# Altium PCB corePCB.PcbDoc (part 1 of 3)
Units mil, origin at the board's own origin, x right, y up, seen from the top; angles counter-clockwise.
Board outline 3543.31 x 3543.31 mil, 4 copper layers (Top Layer, Layer 1, Layer 2, Bottom Layer), stack 23.756 mil thick; 90 components, 166 nets, 640 pads, 472 vias.
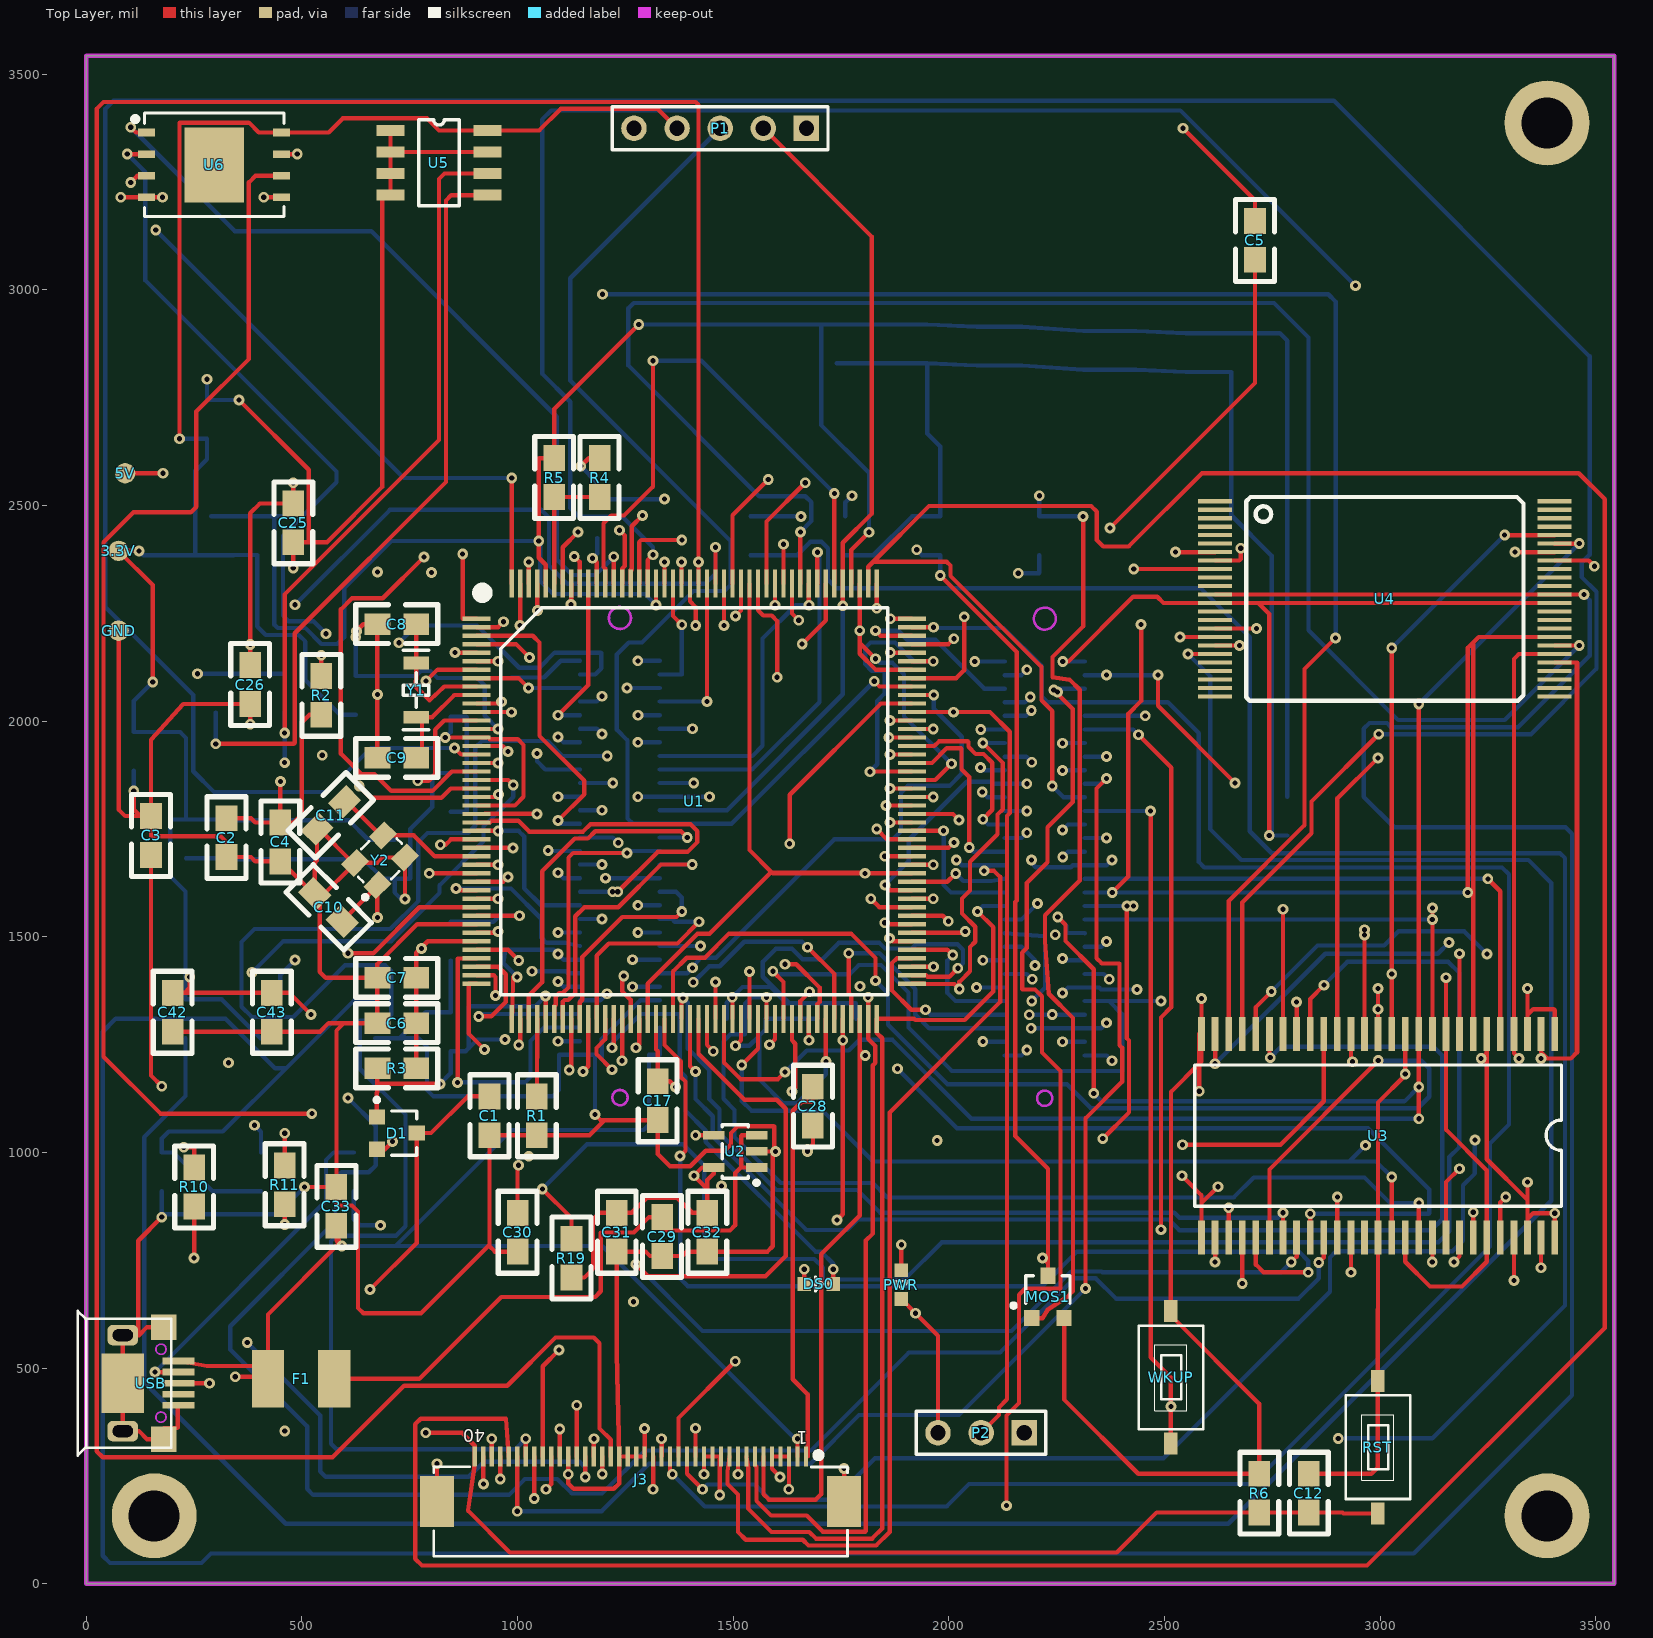
[diagram p0: Top Layer view]
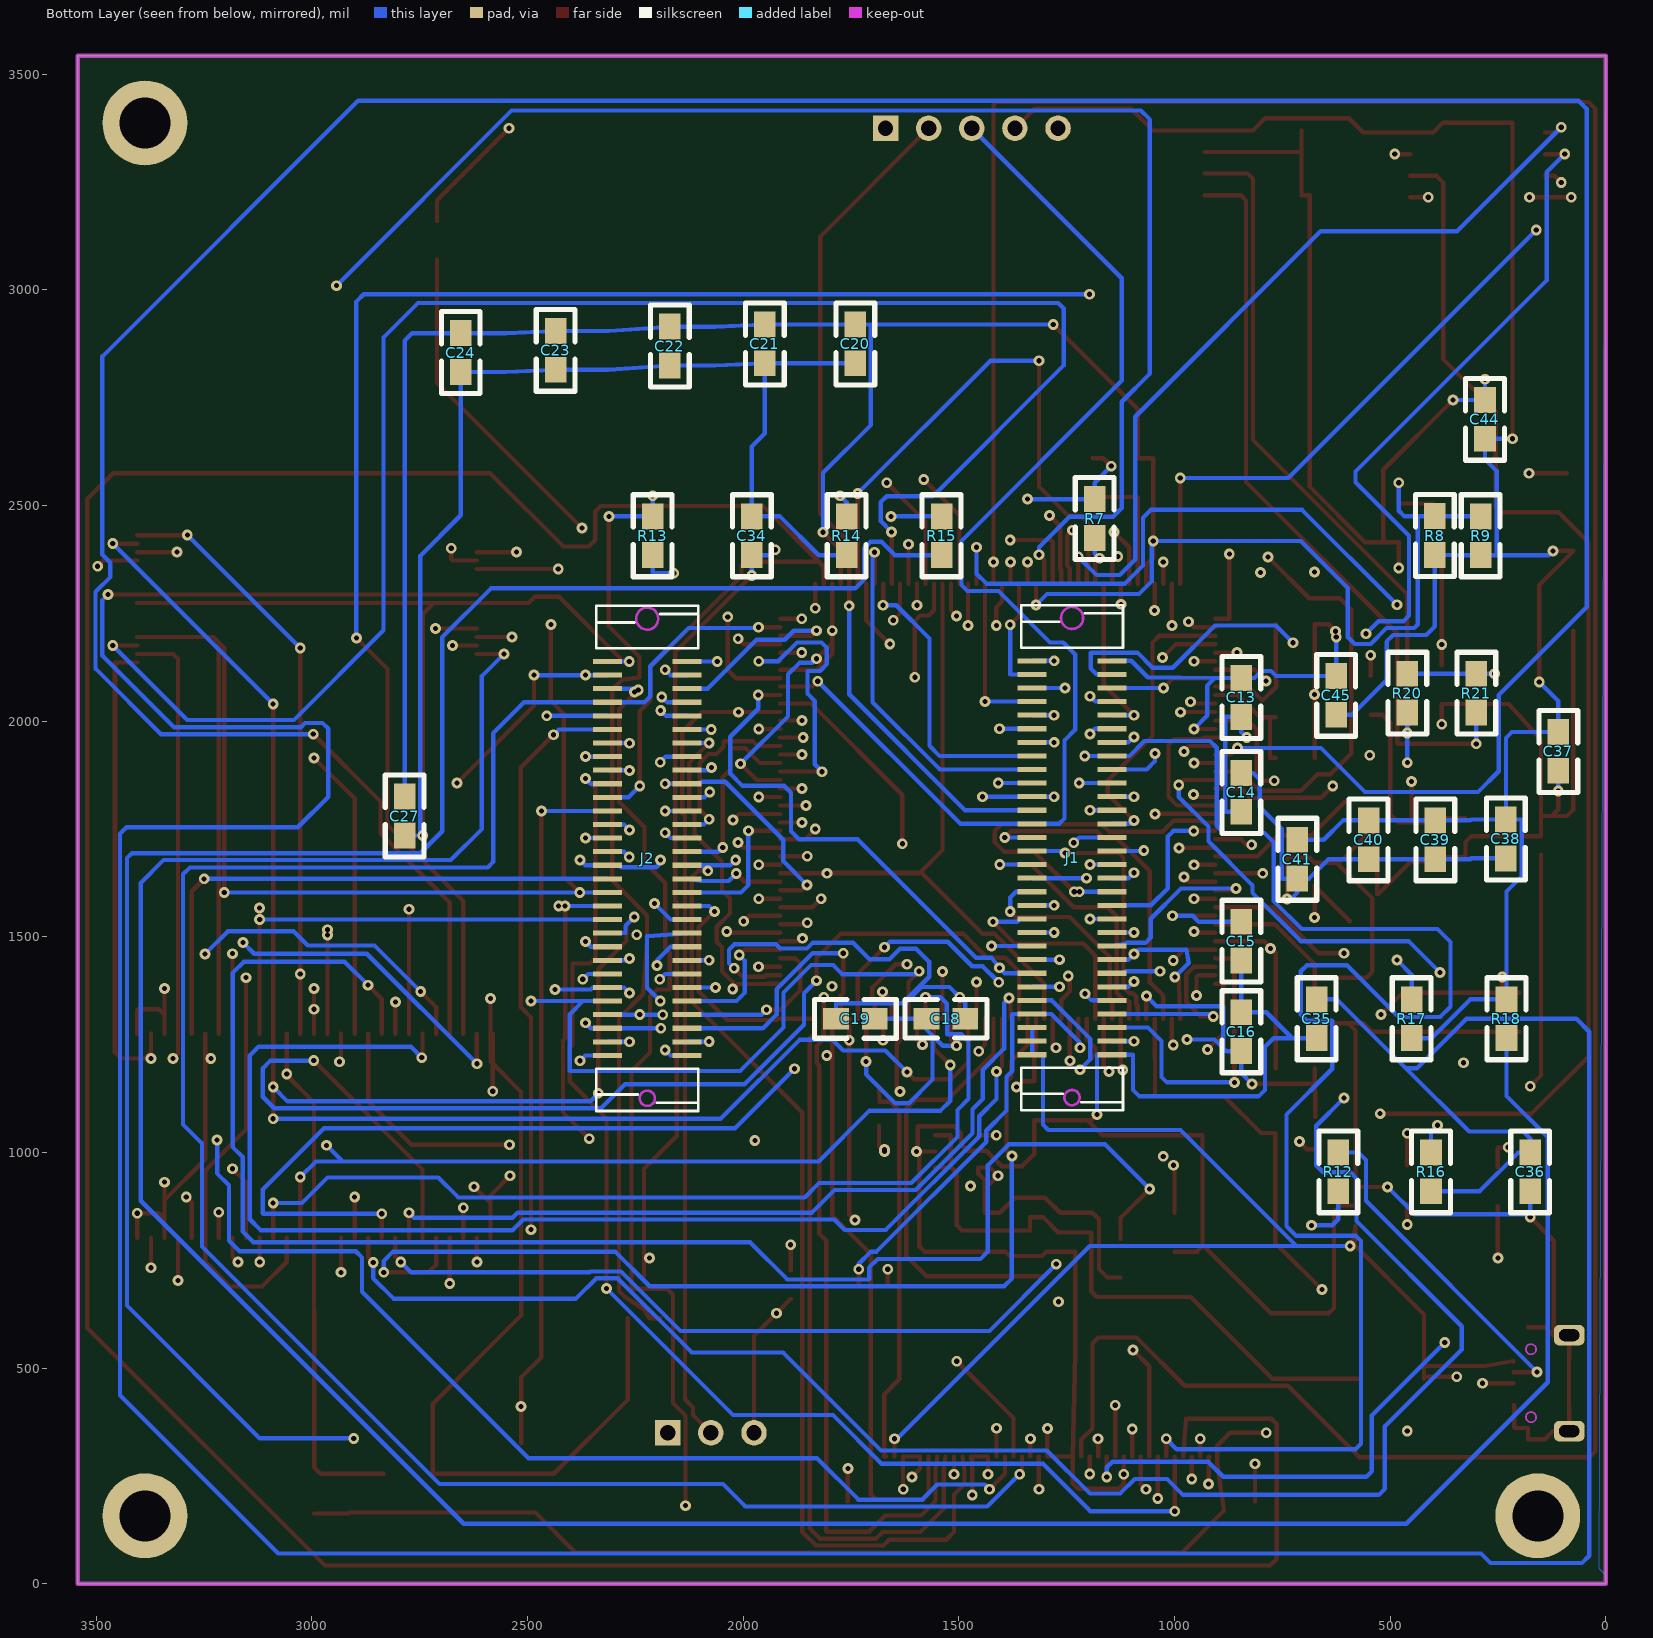
[diagram p1: Bottom Layer view, seen from below]
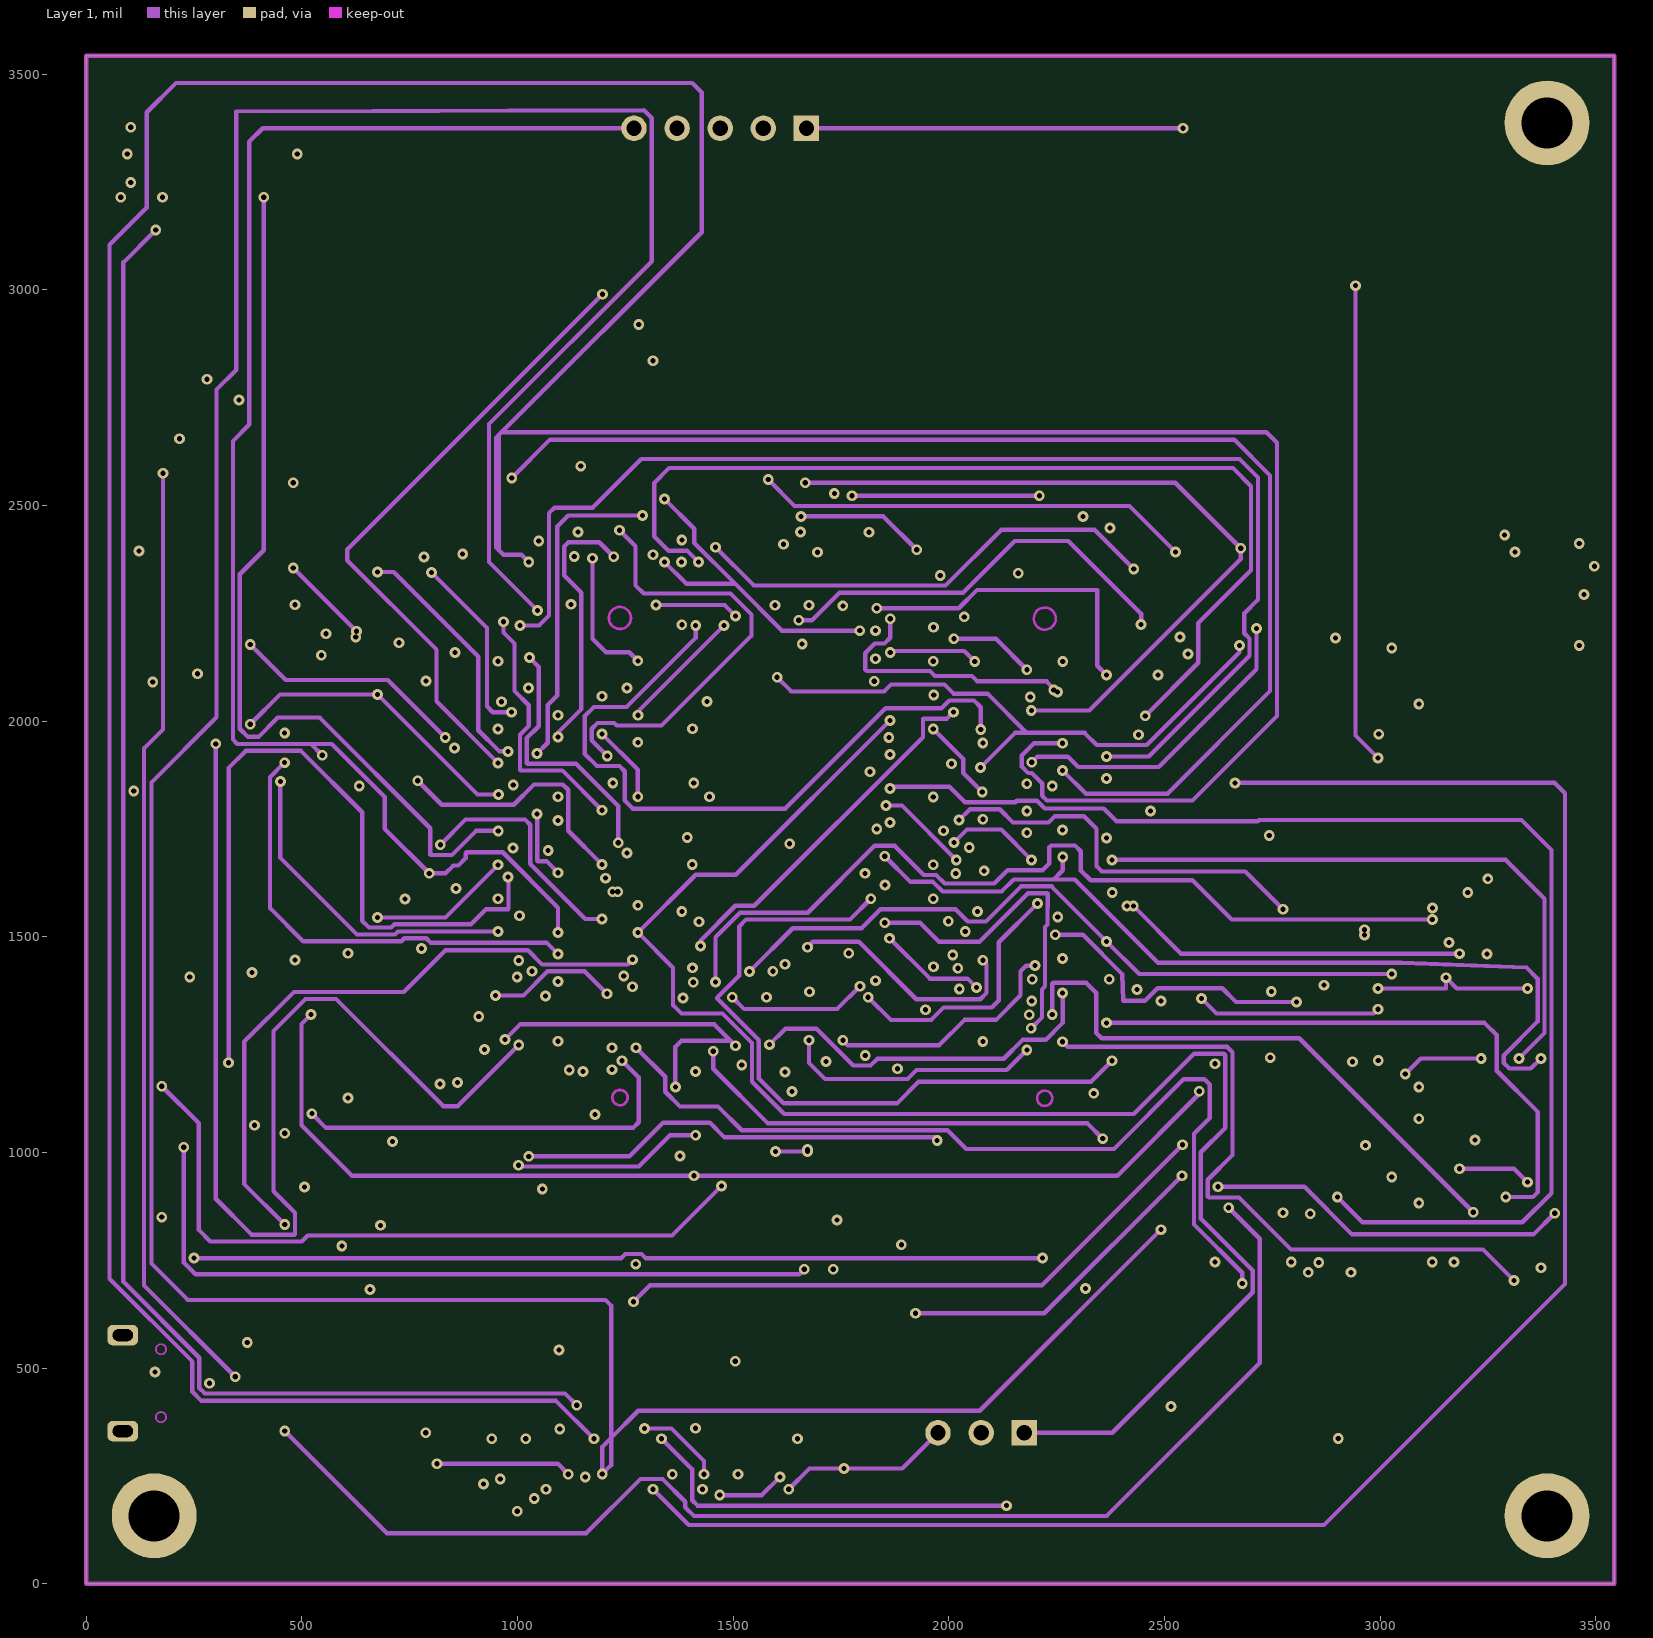
[diagram p2: Layer 1]
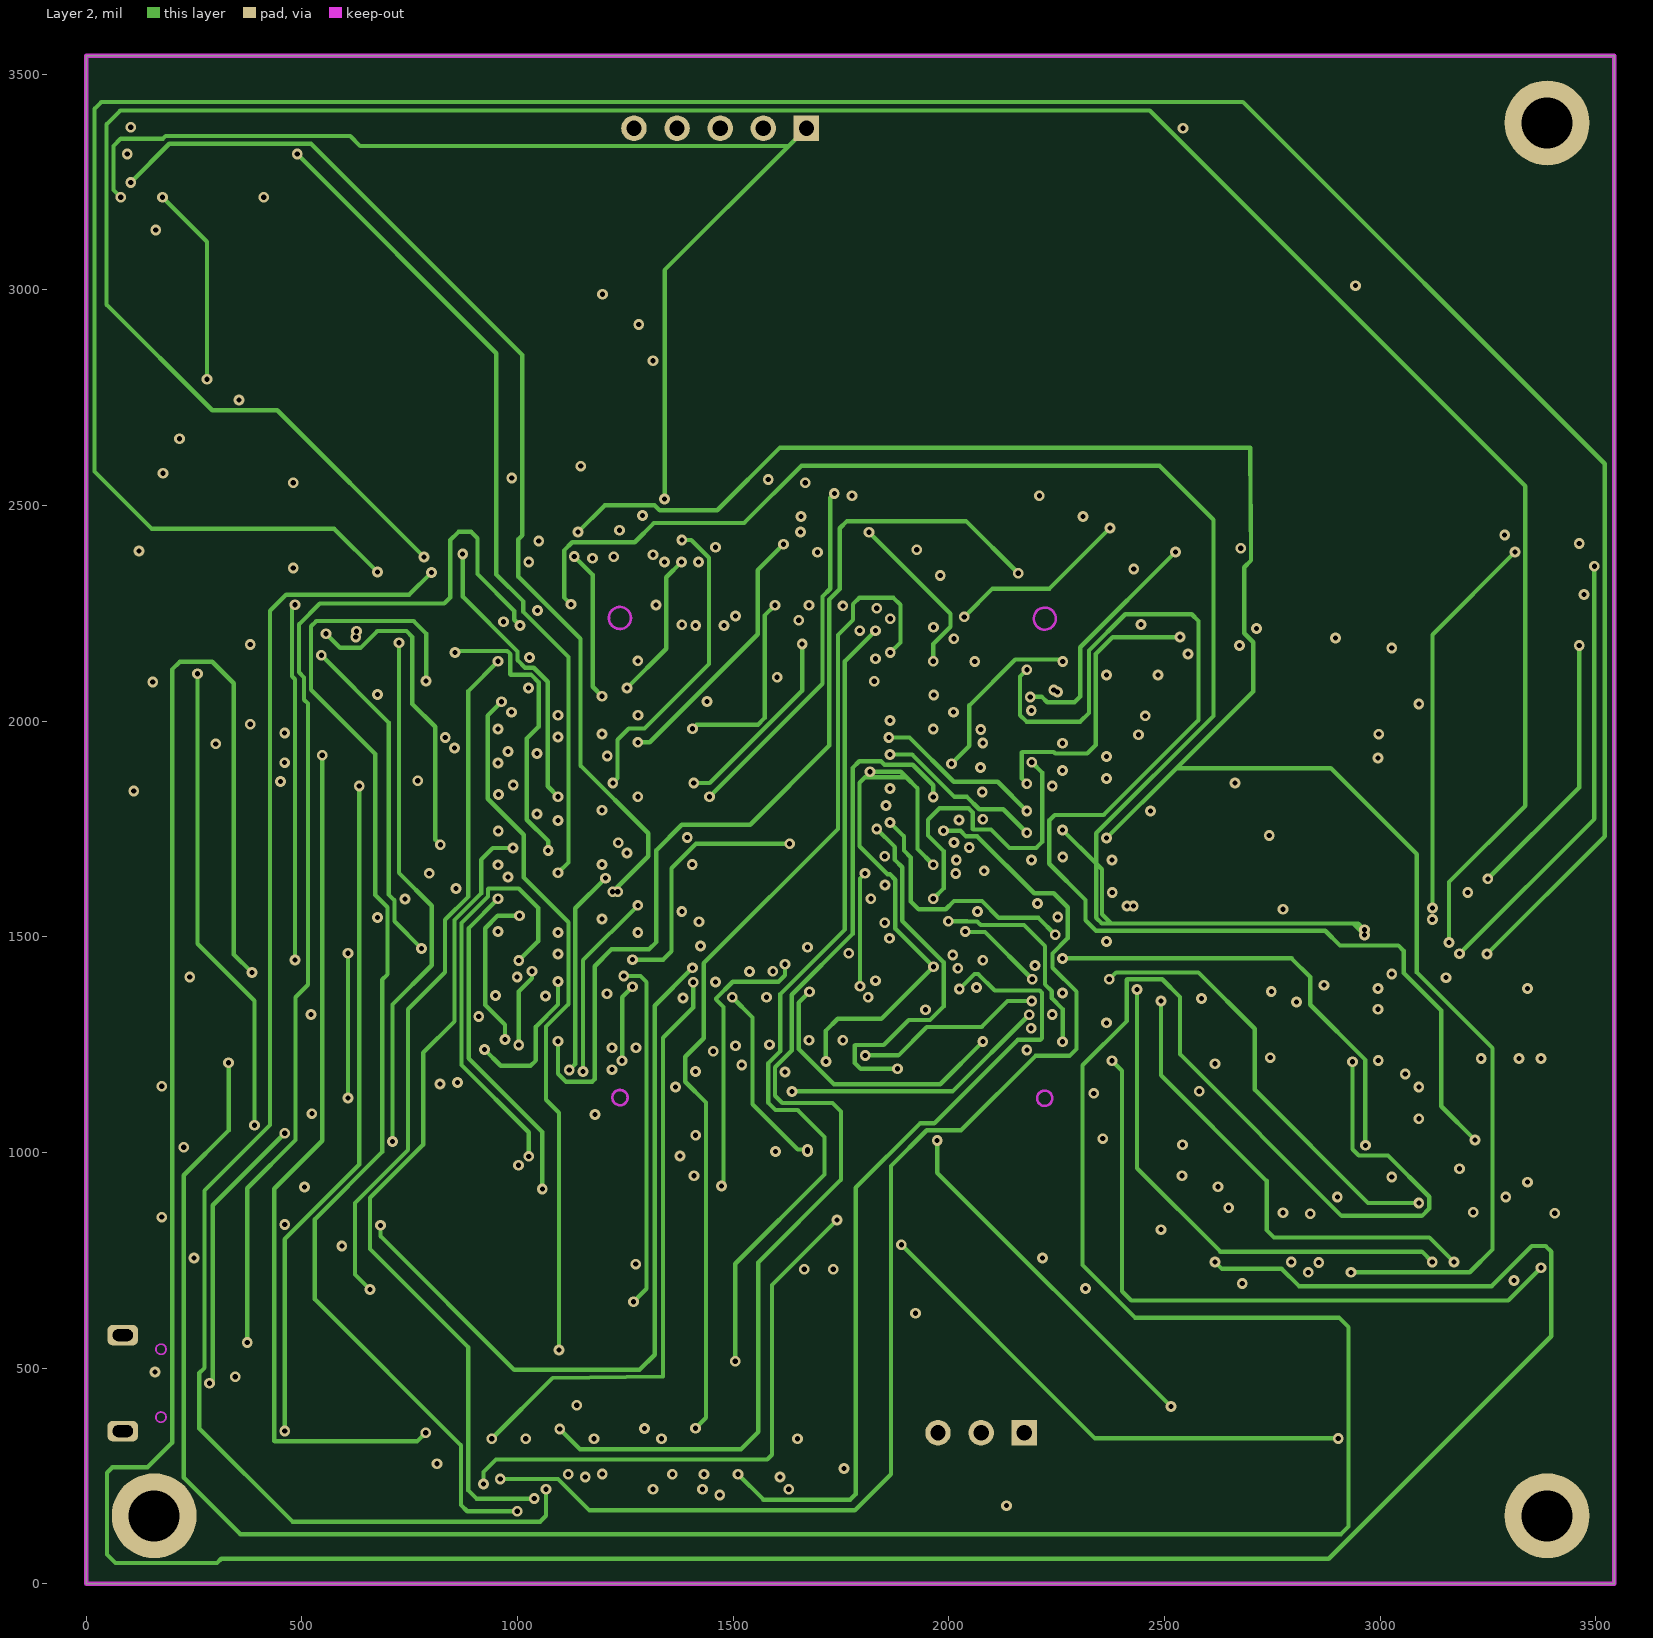
[diagram p3: Layer 2]

## Layer stack, top to bottom
Top Solder: solder mask 0.4, Solder Resist, Dk 3.5
Top Layer: signal copper 1.4
Dielectric1: prepreg 2.8, PP-006, Dk 4.1
Layer 1: signal copper 1.3779
Dielectric2: dielectric 12.6, FR-4, Dk 4.8
Layer 2: signal copper 1.3779
Dielectric3: prepreg 2.8, PP-006, Dk 4.1
Bottom Layer: signal copper 1.4
Bottom Solder: solder mask 0.4, Solder Resist, Dk 3.5

## Board outline
0,0 0,3543.31 3543.31,3543.31 3543.31,0

## Design rules (kind name [scope] priority, off if disabled: settings)
Clearance Clearance_GND [(InPolygon)] p1: gap=20 ignorepadtopadclearanceinfootprint=FALSE except(0: Arc-Hole Track-Hole SMDPad-Hole THPad-Hole Via-Hole Fill-Hole Poly-Hole Region-Hole Text-Hole)
Clearance [All] p2: gap=6 ignorepadtopadclearanceinfootprint=FALSE except(0: Arc-Hole Track-Hole SMDPad-Hole THPad-Hole Via-Hole Fill-Hole Poly-Hole Region-Hole Text-Hole)
ComponentClearance [All] p1: gap=0 collisioncheckmode=3 verticalgap=0 showdistances=FALSE
HoleSize [All] p1: absolutevalues=TRUE maxlimit=1000 minlimit=1 maxpercent=80.000 minpercent=20.000
HoleSize Testpoint [All] p2: absolutevalues=TRUE maxlimit=100 minlimit=1 maxpercent=80.000 minpercent=20.000
HoleSize TestPointUsage [All] p3: absolutevalues=TRUE maxlimit=100 minlimit=1 maxpercent=80.000 minpercent=20.000
MinimumSolderMaskSliver [All] p1: minsoldermaskwidth=0
ParallelSegment ParallelSegment_1 [InNetClass('dcmi') vs InNetClass('dcmi')] p1: limit=10000 gap=10
ParallelSegment [InNetClass('fmc') vs InNetClass('spi')] p2: limit=10000 gap=10
PlaneConnect [All] p1: planeconnectstyle=Direct reliefexpansion=20 reliefentries=4 reliefconductorwidth=10 reliefairgap=10
PolygonConnect [All] p1: connectstyle=Direct reliefconductorwidth=10 reliefentries=4 polygonreliefangle="90 Angle" airgapwidth=10
RoutingVias [All] p1: holewidth=12 width=25 viastyle="Through Hole" minholewidth=8 minwidth=15 maxholewidth=50 maxwidth=50
SilkToSilkClearance [All] p1: silktosilkclearance=0
SilkToSolderMaskClearance SilkscreenOverComponentPads [IsPad] p1: minsilkscreentomaskgap=0 clearancetoexposedcopper=TRUE
SolderMaskExpansion [All] p1: expansion=4
Width [All] p1: maxlimit=100 minlimit=6 preferedwidth=10
24 further rules are at their usual default settings.

## Classes and differential pairs
net class spi: PE2 PE4 PE5 PE6
net class fmc: FMC_A0 FMC_A1 FMC_A2 FMC_A3 FMC_A4 FMC_A5 FMC_A6 FMC_A7 FMC_A8 FMC_A9 FMC_A10 FMC_A11 FMC_A12 FMC_A16_CLE FMC_A17_ALE FMC_A18 FMC_BA0 FMC_BA1 FMC_D0 FMC_D1 FMC_D2 FMC_D3 FMC_D4 FMC_D5 FMC_D6 FMC_D7 FMC_D8 FMC_D9 FMC_D10 FMC_D11 FMC_D12 FMC_D13 FMC_D14 FMC_D15 FMC_NBL0 FMC_NBL1 FMC_NCE3 FMC_NE1 FMC_NOE FMC_NWAIT FMC_NWE FMC_SDCKE0 FMC_SDCLK FMC_SDNCAS FMC_SDNE0 FMC_SDNRAS FMC_SDNWE
net class dcmi: DCMI_D0 DCMI_D1 DCMI_D2 DCMI_D3 DCMI_D4 DCMI_D5 DCMI_D6 DCMI_D7 DCMI_HREF DCMI_PLCK DCMI_SCL DCMI_SDA DCMI_XCLK
component class circuit: 3.3V 5V C28 C29 C30 C31 C32 C33 C34 DS0 F1 GND J3 MOS1 P2 PWR R10 R11 R12 R13 R14 R15 U2 USB WKUP
component class mem: C35 C36 C37 C38 C39 C40 C41 C42 C43 C44 C45 R16 R17 R18 R19 R20 R21 U3 U4 U5 U6
component class stm: C1 C2 C3 C4 C5 C6 C7 C8 C9 C10 C11 C12 C13 C14 C15 C16 C17 C18 C19 C20 C21 C22 C23 C24 C25 C26 C27 D1 J1 J2 P1 R1 R2 R3 R4 R5 R6 R7 R8 R9 RST U1 Y1 Y2

## Components (designator, comment, footprint, x,y, rotation, side; value= is the part's Value field where it differs from the comment)
3.3V "TEST POINT" TP-1.5 75,2395 r90 top
5V "TEST POINT" TP-1.5 90,2575 r0 top
C1 "104" 0805 935,1130 r270 top
C2 "104" 0805 325,1685 r90 top
C3 "225" 0805 150,1690 r90 top
C4 "225" 0805 450,1675 r90 top
C5 "225" 0805 2710,3070 r90 top
C6 "10uF" 0805 675,1300 r0 top
C7 "104" 0805 675,1405 r0 top
C8 "6pF" 0805 675,2225 r0 top
C9 "6pF" 0805 675,1915 r0 top
C10 "22pF" 0805 530,1600 r315 top
C11 "22pF" 0805 535,1750 r45 top
C12 "104" 0805 2835,165 r90 top
C13 "104" 0805 845,2100 r270 bottom
C14 "104" 0805 845,1880 r270 bottom
C15 "104" 0805 845,1445 r90 bottom
C16 "104" 0805 845,1325 r270 bottom
C17 "104" 0805 1325,1075 r90 top
C18 "104" 0805 1485,1310 r0 bottom
C19 "104" 0805 1785,1310 r180 bottom
C20 "104" 0805 1740.06,2830 r90 bottom
C21 "104" 0805 1950,2830 r90 bottom
C22 "104" 0805 2170.06,2825 r90 bottom
C23 "104" 0805 2435,2815 r90 bottom
C24 "104" 0805 2655.06,2810 r90 bottom
C25 "104" 0805 479.94,2415 r90 top
C26 "104" 0805 380,2040 r90 top
C27 "104" 0805 2785.06,1735 r90 bottom
C28 "104" 0805 1684.94,1062.4 r90 top
C29 "10uF" 0805 1335,760 r90 top
C30 "103" 0805 1000,770 r90 top
C31 "104" 0805 1230,770 r90 top
C32 "10uF" 0805 1440,770 r90 top
C33 "104" 0805 580,830 r90 top
C34 "104" 0805 1980.13,2385 r90 bottom
C35 "104" 0805 670.13,1265 r90 bottom
C36 "104" 0805 175.13,910 r90 bottom
C37 "104" 0805 110.06,1885 r90 bottom
C38 "104" 0805 231.45,1681.93 r90 bottom
C39 "104" 0805 395,1680 r90 bottom
C40 "104" 0805 550,1680 r90 bottom
C41 "104" 0805 715,1635 r90 bottom
C42 "104" 0805 200,1280 r90 top
C43 "104" 0805 430,1280 r90 top
C44 "104" 0805 280,2655 r90 bottom
C45 "104" 0805 625,2015 r90 bottom
D1 "BAT54C" SOT-23 715,1045 r270 top
DS0 "LED" SMDLED-0603 1665,695 r0 top
F1 "1812L075PR" *1812 498.23,475 r0 top
GND "TEST POINT" TP-1.5 75,2210 r90 top
J1 "3710M060046G3FT01" 3710F060046G3FT01 1330,1226.61 r0 bottom
J2 "3710M060046G3FT01" 3710F060046G3FT01 2315.04,1225.04 r0 bottom
J3 "RGBLCD" FPC-TOP40 1668.7,299 r180 top
MOS1 "SI2301" SO-G3/C2.5 2230,665 r0 top
P1 "SWD" HDR1X5 1670,3375 r180 top
P2 "USART1" HDR1X3 2175,350 r180 top
PWR "LED" SMDLED-0603 1890,726.93 r270 top
R1 "10K" 0805 1045,1130 r270 top
R2 "10R" 0805 545,2015 r90 top
R3 "10R" 0805 765,1195 r180 top
R4 "0R" 0805 1190.06,2520 r90 top
R5 "0R" 0805 1085,2520 r90 top
R6 "10K" 0805 2720,165 r90 top
R7 "100K" 0805 1185,2425 r90 bottom
R8 "0R" 0805 396.13,2385.59 r90 bottom
R9 "0R" 0805 290,2385 r90 bottom
R10 "1K" 0805 249.94,875 r90 top
R11 "10R" 0805 460,880 r90 top
R12 "10R" 0805 620.06,910 r90 bottom
R13 "10R" 0805 2210.13,2385 r90 bottom
R14 "100K" 0805 1760.13,2385 r90 bottom
R15 "1K" 0805 1540.13,2385 r90 bottom
R16 "0R" 0805 405.13,910 r90 bottom
R17 "10K" 0805 450.13,1265 r90 bottom
R18 "10K" 0805 230.13,1265 r90 bottom
R19 "10K" 0805 1125,710 r90 top
R20 "4.7K" 0805 460,2020 r90 bottom
R21 "4.7K" 0805 300.13,2020 r90 bottom
RST "KEY_M" KEY_SOP3625 2995,162.91 r90 top
U1 "STM32F767IGT6" LQFP176 905.3,2237.78 r0 top locked
U2 "CAT6219-330TD" SOT-23-5 1555,965 r180 top
U3 "W9825G6KH" TSOP54 3404.96,1275 r270 top
U4 "MT29F4G08" TSOP48 2617.6,2510.27 r0 top
U5 "24C02" SOP-8 705.59,3370 r0 top
U6 "W25Q256" WSON8 296.5,3290 r0 top
USB "USB-AB" "USB_AB - 5S - B" 0,465 r90 top
WKUP "KEY_UP" KEY_SOP3625 2515,325 r90 top
Y1 "32.768KHz" XTAL3215 765,2135 r270 top
Y2 "25Mhz" XTAL3225 675,1620 r45 top

## Footprints (in the part's own frame and the unit in brackets; to place one, negate y for a bottom-side part, rotate by r counter-clockwise, add the part's x,y. Pads: shape width x height; smd on the part's side, far side on the other; paste and mask are expansions set on the pad)
0805 [mil]
  rect 60x50 smd: 1(0,-0.06) 2(90,-0.06)
  silkscreen extent -50,-45 140,45
3710F060046G3FT01 [mm]
  rect 1.7x0.3 smd: 1(-4.7,0) 2(-4.7,-0.8) 3(-4.7,-1.6) 4(-4.7,-2.4) 5(-4.7,-3.2) 6(-4.7,-4) 7(-4.7,-4.8) 8(-4.7,-5.6) 9(-4.7,-6.4) 10(-4.7,-7.2) 11(-4.7,-8) 12(-4.7,-8.8) 13(-4.7,-9.6) 14(-4.7,-10.4) 15(-4.7,-11.2) 16(-4.7,-12) 17(-4.7,-12.8) 18(-4.7,-13.6) 19(-4.7,-14.4) 20(-4.7,-15.2) 21(-4.7,-16) 22(-4.7,-16.8) 23(-4.7,-17.6) 24(-4.7,-18.4) 25(-4.7,-19.2) 26(-4.7,-20) 27(-4.7,-20.8) 28(-4.7,-21.6) 29(-4.7,-22.4) 30(-4.7,-23.2) 31(0,-23.2) 32(0,-22.4) 33(0,-21.6) 34(0,-20.8) 35(0,-20) 36(0,-19.2) 37(0,-18.4) 38(0,-17.6) 39(0,-16.8) 40(0,-16) 41(0,-15.2) 42(0,-14.4) 43(0,-13.6) 44(0,-12.8) 45(0,-12) 46(0,-11.2) 47(0,-10.4) 48(0,-9.6) 49(0,-8.8) 50(0,-8) 51(0,-7.2) 52(0,-6.4) 53(0,-5.6) 54(0,-4.8) 55(0,-4) 56(0,-3.2) 57(0,-2.4) 58(0,-1.6) 59(0,-0.8) 60(0,0)
  Keep-Out Layer circle w0.152: c-2.35,-25.725 r0.65
  Keep-Out Layer circle w0.152: c-2.35,2.525 r0.45
  silkscreen extent -5.35,-26.48 0.65,3.27
*1812 [mm]
  rect 1.9x3.4 smd: 1(-1.95,0) 2(1.95,0)
FPC-TOP40 [mm]
  rect 0.25x1.2 smd: 1(0,0.102) 2(0.5,0.102) 3(1,0.102) 4(1.5,0.102) 5(2,0.102) 6(2.5,0.102) 7(3,0.102) 8(3.5,0.102) 9(4,0.102) 10(4.5,0.102) 11(5,0.102) 12(5.5,0.102) 13(6,0.102) 14(6.5,0.102) 15(7,0.102) 16(7.5,0.102) 17(8,0.102) 18(8.5,0.102) 19(9,0.102) 20(9.5,0.102) 21(10,0.102) 22(10.5,0.102) 23(11,0.102) 24(11.5,0.102) 25(12,0.102) 26(12.5,0.102) 27(13,0.102) 28(13.5,0.102) 29(14,0.102) 30(14.5,0.102) 31(15,0.102) 32(15.5,0.102) 33(16,0.102) 34(16.5,0.102) 35(17,0.102) 36(17.5,0.102) 37(18,0.102) 38(18.5,0.102) 39(19,0.102) 40(19.5,0.102)
  rect 2x3 smd: A(-2.25,2.754) B(21.725,2.754)
  silkscreen extent -2.45,-0.15 21.92,5.97
HDR1X3 [mm]
  rect 1.5x1.5 hole 0.9: 1(0,0)
  round 1.5 hole 0.9: 2(2.54,0) 3(5.08,0)
  silkscreen extent -1.27,-1.27 6.35,1.27
HDR1X5 [mm]
  rect 1.5x1.5 hole 0.9: 1(0,0)
  round 1.5 hole 0.9: 2(2.54,0) 3(5.08,0) 4(7.62,0) 5(10.16,0)
  silkscreen extent -1.27,-1.27 11.43,1.27
KEY_SOP3625 [mm]
  rect 1.3x0.8 smd: 1(0,0) 2(7.8,0)
  silkscreen extent 0.85,-1.9 6.95,1.9
LQFP176 [mm]
  rect 1.65x0.254 smd: 1(0,0) 2(0,-0.5) 3(0,-1) 4(0,-1.5) 5(0,-2) 6(0,-2.5) 7(0,-3) 8(0,-3.5) 9(0,-4) 10(0,-4.5) 11(0,-5) 12(0,-5.5) 13(0,-6) 14(0,-6.5) 15(0,-7) 16(0,-7.5) 17(0,-8) 18(0,-8.5) 19(0,-9) 20(0,-9.5) 21(0,-10) 22(0,-10.5) 23(0,-11) 24(0,-11.5) 25(0,-12) 26(0,-12.5) 27(0,-13) 28(0,-13.5) 29(0,-14) 30(0,-14.5) 31(0,-15) 32(0,-15.5) 33(0,-16) 34(0,-16.5) 35(0,-17) 36(0,-17.5) 37(0,-18) 38(0,-18.5) 39(0,-19) 40(0,-19.5) 41(0,-20) 42(0,-20.5) 43(0,-21) 44(0,-21.5) 89(25.631,-21.5) 90(25.631,-21) 91(25.631,-20.5) 92(25.631,-20) 93(25.631,-19.5) 94(25.631,-19) 95(25.631,-18.5) 96(25.631,-18) 97(25.631,-17.5) 98(25.631,-17) 99(25.631,-16.5) 100(25.631,-16) 101(25.631,-15.5) 102(25.631,-15) 103(25.631,-14.5) 104(25.631,-14) 105(25.631,-13.5) 106(25.631,-13) 107(25.631,-12.5) 108(25.631,-12) 109(25.631,-11.5) 110(25.631,-11) 111(25.631,-10.5) 112(25.631,-10) 113(25.631,-9.5) 114(25.631,-9) 115(25.631,-8.5) 116(25.631,-8) 117(25.631,-7.5) 118(25.631,-7) 119(25.631,-6.5) 120(25.631,-6) 121(25.631,-5.5) 122(25.631,-5) 123(25.631,-4.5) 124(25.631,-4) 125(25.631,-3.5) 126(25.631,-3) 127(25.631,-2.5) 128(25.631,-2) 129(25.631,-1.5) 130(25.631,-1) 131(25.631,-0.5) 132(25.631,0)
  rect 0.254x1.65 smd: 45(2.065,-23.566) 46(2.566,-23.566) 47(3.066,-23.566) 48(3.565,-23.566) 49(4.066,-23.566) 50(4.565,-23.566) 51(5.066,-23.566) 52(5.565,-23.566) 53(6.066,-23.566) 54(6.565,-23.566) 55(7.066,-23.566) 56(7.565,-23.566) 57(8.066,-23.566) 58(8.565,-23.566) 59(9.066,-23.566) 60(9.565,-23.566) 61(10.066,-23.566) 62(10.565,-23.566) 63(11.066,-23.566) 64(11.565,-23.566) 65(12.066,-23.566) 66(12.565,-23.566) 67(13.066,-23.566) 68(13.565,-23.566) 69(14.066,-23.566) 70(14.565,-23.566) 71(15.066,-23.566) 72(15.566,-23.566) 73(16.066,-23.566) 74(16.566,-23.566) 75(17.065,-23.566) 76(17.566,-23.566) 77(18.065,-23.566) 78(18.566,-23.566) 79(19.065,-23.566) 80(19.566,-23.566) 81(20.065,-23.566) 82(20.566,-23.566) 83(21.065,-23.566) 84(21.566,-23.566) 85(22.065,-23.566) 86(22.566,-23.566) 87(23.065,-23.566) 88(23.566,-23.566) 133(23.566,2.065) 134(23.065,2.065) 135(22.566,2.065) 136(22.065,2.065) 137(21.566,2.065) 138(21.065,2.065) 139(20.566,2.065) 140(20.065,2.065) 141(19.566,2.065) 142(19.065,2.065) 143(18.566,2.065) 144(18.065,2.065) 145(17.566,2.065) 146(17.065,2.065) 147(16.566,2.065) 148(16.066,2.065) 149(15.566,2.065) 150(15.066,2.065) 151(14.565,2.065) 152(14.066,2.065) 153(13.565,2.065) 154(13.066,2.065) 155(12.565,2.065) 156(12.066,2.065) 157(11.565,2.065) 158(11.066,2.065) 159(10.565,2.065) 160(10.066,2.065) 161(9.565,2.065) 162(9.066,2.065) 163(8.565,2.065) 164(8.066,2.065) 165(7.565,2.065) 166(7.066,2.065) 167(6.565,2.065) 168(6.066,2.065) 169(5.565,2.065) 170(5.066,2.065) 171(4.565,2.065) 172(4.066,2.065) 173(3.565,2.065) 174(3.066,2.065) 175(2.566,2.065) 176(2.065,2.065)
  silkscreen extent 0.04,-22.15 24.22,1.82
SMDLED-0603 [mil]
  rect 32x32 smd: 1(0,0) 2(66.93,0)
  silkscreen extent 26,-17 42,17
SO-G3/C2.5 [mm]
  rect 0.9x0.95 smd: 1(-0.95,-1.25) 2(0.95,-1.25) 3(0,1.25)
  silkscreen extent -2.15,-0.63 1.3,1.25
SOP-8 [mil]
  rect 65x25 smd: 1(0,0) 2(0,-50) 3(0,-100) 4(0,-150) 5(224.41,-150) 6(224.41,-100) 7(224.41,-50) 8(224.41,0)
  silkscreen extent 65,-175 159,25
SOT-23 [mm]
  rect 0.9x0.95 smd: 1(-0.95,-1.048) 2(0.95,-1.048) 3(0,1.302)
  silkscreen extent -2.07,-1.17 1.3,1.3
SOT-23-5 [mil]
  rect 50x20 smd: 1(0,0) 2(0,-37.4) 3(0,-74.8) 4(100,-74.8) 5(100,0)
  silkscreen extent 0,-99 80,35
TP-1.5 [mm]
  round 1.2 smd: 1(0,0)
TSOP48 [mm]
  rect 2x0.25 smd: 1(0,0) 2(0,-0.5) 3(0,-1) 4(0,-1.5) 5(0,-2) 6(0,-2.5) 7(0,-3) 8(0,-3.5) 9(0,-4) 10(0,-4.5) 11(0,-5) 12(0,-5.5) 13(0,-6) 14(0,-6.5) 15(0,-7) 16(0,-7.5) 17(0,-8) 18(0,-8.5) 19(0,-9) 20(0,-9.5) 21(0,-10) 22(0,-10.5) 23(0,-11) 24(0,-11.5) 25(20,-11.5) 26(20,-11) 27(20,-10.5) 28(20,-10) 29(20,-9.5) 30(20,-9) 31(20,-8.5) 32(20,-8) 33(20,-7.5) 34(20,-7) 35(20,-6.5) 36(20,-6) 37(20,-5.5) 38(20,-5) 39(20,-4.5) 40(20,-4) 41(20,-3.5) 42(20,-3) 43(20,-2.5) 44(20,-2) 45(20,-1.5) 46(20,-1) 47(20,-0.5) 48(20,0)
  silkscreen extent 1.83,-11.75 18.17,0.25
TSOP54 [mm]
  rect 2x0.4 smd: 1(0,0) 2(0,-0.8) 3(0,-1.6) 4(0,-2.4) 5(0,-3.2) 6(0,-4) 7(0,-4.8) 8(0,-5.6) 9(0,-6.4) 10(0,-7.2) 11(0,-8) 12(0,-8.8) 13(0,-9.6) 14(0,-10.4) 15(0,-11.2) 16(0,-12) 17(0,-12.8) 18(0,-13.6) 19(0,-14.4) 20(0,-15.2) 21(0,-16) 22(0,-16.8) 23(0,-17.6) 24(0,-18.4) 25(0,-19.2) 26(0,-20) 27(0,-20.8) 28(12,-20.8) 29(12,-20) 30(12,-19.2) 31(12,-18.4) 32(12,-17.6) 33(12,-16.8) 34(12,-16) 35(12,-15.2) 36(12,-14.4) 37(12,-13.6) 38(12,-12.8) 39(12,-12) 40(12,-11.2) 41(12,-10.4) 42(12,-9.6) 43(12,-8.8) 44(12,-8) 45(12,-7.2) 46(12,-6.4) 47(12,-5.6) 48(12,-4.8) 49(12,-4) 50(12,-3.2) 51(12,-2.4) 52(12,-1.6) 53(12,-0.8) 54(12,0)
  silkscreen extent 1.83,-21.2 10.16,0.4
"USB_AB - 5S - B" [mm]
  rect 0.4x1.9 smd: 1(1.3,-5.436) 2(0.65,-5.436) 3(0,-5.436) 4(-0.65,-5.436) 5(-1.3,-5.436)
  rrect50% 1.2x1.8 hole 0.7 slot 1.2 at 90 deg: 6(2.825,-2.15) 7(-2.825,-2.15)
  rect 1.5x1.5 smd: 8(-3.302,-4.572) 9(3.302,-4.572)
  rect 3.5x2.5 smd: 9(0,-2.159)
  Keep-Out Layer circle w0.102: c2,-4.4 r0.3
  Keep-Out Layer circle w0.102: c-2,-4.4 r0.3
  silkscreen extent -4.26,-5 4.26,0.51
WSON8 [mm]
  rect 1x0.45 smd: 1(-3.975,1.905) 2(-3.975,0.635) 3(-3.975,-0.635) 4(-3.975,-1.905) 5(3.975,-1.905) 6(3.975,-0.635) 7(3.975,0.635) 8(3.975,1.905)
  rect 3.5x4.4 smd: 9(0,0)
  silkscreen extent -4.8,-3.05 4.1,3.05
XTAL3215 [mm]
  rect 0.75x1.5 smd: 1(0,0) 2(3.2,0)
  silkscreen extent -0.74,-0.75 3.94,0.75
XTAL3225 [mm]
  rect 1.3x1.05 smd: 1(0,0) 2(2.3,0) 3(2.3,1.85) 4(0,1.85)
  silkscreen extent -1.14,-0.33 2.74,2.17

## Part data
3.3V 5V GND: library part TEST-POINT, "测试点"
C1 C2 C3 C4 C5 C6 C7 C8 C9 C10 C11 C12 C13 C14 C15 C16 C17 C18 C19 C20 C21 C22 C23 C24 C25 C26 C27 C28 C29 C30 C31 C32 C33 C34 C35 C36 C37 C38 C39 C40 C41 C42 C43 C44 C45: library part C
D1: "双肖特基二极管"
F1: "PTC Resettable Fuse 0.75A_hold_ 1.5A_trip_ 13.2VDC 100A 0.8W 0.2s 0.1Ohm SMD Solder Pad 1812 T/R"
J1 J2: library part 3710F, "3710F060046G3FT01"
J3: library part FPC-40, "FPC-40P-0.5mm"
MOS1: library part MOS-P, "IRLML6401/SI2301"
P1: library part "Header 5", "Header, 5-Pin"
P2: library part "Header 3", "Header, 3-Pin"
R1 R2 R3 R4 R5 R6 R7 R8 R9 R10 R11 R12 R13 R14 R15 R16 R17 R18 R19 R20 R21: library part R
U2: "3.3V 500mA LDO"
U3: library part IS42S16160B, "32MB SDRAM"
U4: library part K9F2G08U0C, "256MB NAND FLASH"
U5: library part 24C256, "EEPROM"
U6: library part W25Q128, "W25Q128"
USB: "MicroUSB"
WKUP: library part KEY_M
Y1: library part XTAL, "普通晶振"
Y2: library part XTAL_3225, "3225贴片无"

## Free pads (board coordinates)
  round 196.85 hole 118.11: 0(157.48,157.48) 0(3387.52,157.48) 0(3387.52,3387.52)

## Via types
v1: diameter 25, hole 12, Top Layer to Bottom Layer, 472 vias

## Nets (pads, with @x,y where several pads share a name; then routed paths per layer and width w, separated by ;. In a path a pad name is that pad's centre, name@x,y a point inside that pad or via, vN(x,y) a via of type N, cw(c..) or ccw(c..) an arc to the next point about the centre after c; other vN are vias at no path point)
1WIRE_DQ: J2.4 U1.92 | length 399.5
  Top Layer w10: U1.92@1914.39,1450.37 1880,1450.37 1867.5,1437.87 1867.5,1376.5 1913,1331 v1(1946,1331)
  Bottom Layer w10: v1(1946,1331) 1957.47,1319.53 J2.4@2130,1319.53
BOOT0: J1.31 R7.1 U1.166 | length 478.5
  Top Layer w10: v1(1174,2378) 1183.47,2368.53 U1.166@1183.47,2319.09
  Layer 1 w10: v1(1174,2378) 1174,2191 1205,2160 1259,2160 v1(1279,2140)
  Bottom Layer w10: v1(1174,2378) 1184.94,2388.94 R7.1@1184.94,2425 ; v1(1279,2140) J1.31@1330,2140
DCMI_D0: J2.16 U1.115 | length 452.7
  Top Layer w10: U1.115@1914.39,1903.13 1960.87,1903.13 1995,1937.26 2028.24,1937.26 2029.5,1936 2029.5,1888.63 2047.5,1870.63 v1(2047.5,1706.94)
  Bottom Layer w10: v1(2047.5,1706.94) 2056.96,1697.48 J2.16@2130,1697.48
DCMI_D1: J2.17 U1.116 | length 498.8
  Top Layer w10: v1(1864,1923) 1864.18,1922.82 U1.116@1914.39,1922.82
  Layer 2 w10: v1(1864,1923) 1915,1923 2013.42,1824.58 2042.03,1824.58 2070.61,1796 2126.48,1796 v1(2181,1741.48)
  Bottom Layer w10: J2.17@2130,1728.98 2168.5,1728.98 v1(2181,1741.48)
DCMI_D2: J2.18 U1.117 | length 414.3
  Top Layer w10: U1.117@1914.39,1942.5 1966.5,1942.5 1977.26,1953.26 2044.24,1953.26 2045.5,1952 2045.5,1940.76 2062.26,1924 2080.5,1924 2100.98,1903.52 2100.98,1794.48 v1(2079,1772.5)
  Bottom Layer w10: v1(2079,1772.5) 2091.03,1760.47 J2.18@2130,1760.47
DCMI_D3: J2.19 U1.118 | length 494.9
  Top Layer w10: v1(1861,1962.19) U1.118@1914.39,1962.19
  Layer 2 w10: v1(1861,1962.19) 1908.81,1962.19 2011.54,1859.46 2113.54,1859.46 v1(2181,1792)
  Bottom Layer w10: J2.19@2130,1791.97 v1(2181,1792)
DCMI_D4: J1.39 U1.140 | length 857.5
  Top Layer w10: U1.140@1695.28,2319.09 v1(1695.28,2392)
  Bottom Layer w10: J1.39@1330,1888.03 1544.03,1888.03 1700,2044 1700,2387.28 v1(1695.28,2392)
DCMI_D5: J1.36 U1.145 | length 574.8
  Top Layer w10: v1(1596.85,2269) U1.145@1596.85,2319.09
  Layer 2 w10: v1(1405.52,1982.52) 1415,1992 1557.46,1992 1572.96,2007.5 1572.96,2245.11 v1(1596.85,2269)
  Bottom Layer w10: J1.36@1330,1982.52 v1(1405.52,1982.52)
DCMI_D6: J1.26 U1.167 | length 384.9
  Top Layer w10: v1(1094,2014.02) 1163.78,2083.8 U1.167@1163.78,2319.09
  Bottom Layer w10: v1(1094,2014.02) J1.26@1144.96,2014.02
DCMI_D7: J1.27 U1.168 | length 475
  Top Layer w10: v1(1131.6,2382) 1144.1,2369.5 U1.168@1144.1,2319.09
  Layer 2 w10: v1(1131.6,2382) 1174.28,2339.31 1174.28,2079.73 v1(1196,2058.01)
  Bottom Layer w10: J1.27@1144.96,2045.51 1183.5,2045.51 v1(1196,2058.01)
DCMI_HREF: J2.3 U1.85 | length 622.8
  Top Layer w10: v1(1768,1462) 1768,1370 1774.02,1363.98 U1.85@1774.02,1310
  Bottom Layer w10: v1(1768,1462) 1839,1462 1922.5,1378.5 1922.5,1320 1954.47,1288.03 J2.3@2130,1288.03
DCMI_PLCK: J1.47 U1.52 | length 726.7
  Top Layer w10: v1(1120,1191) 1124.41,1195.41 U1.52@1124.41,1310
  Layer 2 w10: v1(1120,1191) 1134,1205 1134,1566.06 v1(1204,1636.06)
  Bottom Layer w10: v1(1204,1636.06) J1.47@1330,1636.06
DCMI_RESET: J1.25 J1.41 U1.138 U1.165 | length 2565.1
  Top Layer w10: U1.165@1203.15,2319.09 1203.15,2354 1199.47,2357.68 1199.47,2458.97 1217.5,2477 1247,2477 1314,2544 v1(1314,2836) ; U1.138@1734.65,2319.09 v1(1734.65,2528)
  Layer 1 w10: v1(1196,1970.5) 1279,1887.5 v1(1279,1825.04)
  Layer 2 w10: v1(1445,1825.04) 1707,2087.04 1707,2289 1725,2307 1725,2518.35 v1(1734.65,2528)
  Bottom Layer w10: J1.25@1144.96,1982.52 1183.98,1982.52 v1(1196,1970.5) ; v1(1279,1825.04) J1.41@1330,1825.04 v1(1445,1825.04) ; v1(1314,2836) 1426.65,2836 v1(1734.65,2528)
DCMI_SCL: J1.22 U1.162 | length 1051.1
  Top Layer w10: U1.162@1262.21,2319.09 1262.21,2351 1265,2351 1265,2452 v1(1290,2477)
  Layer 1 w10: v1(1045,1925.03) 1070,1950.03 1070,2037.51 1092.1,2059.6 1092.1,2451.6 1117.5,2477 v1(1290,2477)
  Bottom Layer w10: v1(1045,1925.03) 1045,1907.5 1064.47,1888.03 J1.22@1144.96,1888.03
DCMI_SDA: J1.21 U1.161 | length 989.2
  Top Layer w10: U1.161@1281.89,2319.09 1281.89,2415.31 1286.58,2420 v1(1381,2420)
  Layer 2 w10: v1(1221,1857) 1232,1868 1232,1957 1258,1983 1294.52,1983 1444,2132.48 1444,2379 1403,2420 v1(1381,2420)
  Bottom Layer w10: J1.21@1144.96,1856.54 1220.54,1856.54 v1(1221,1857)
DCMI_XCLK: J2.20 U1.119 | length 300.2
  Top Layer w10: U1.119@1914.39,1981.87 v1(1964,1981.87)
  Layer 1 w10: v1(1964,1981.87) 2033.6,1912.27 2033.6,1879.85 v1(2077.48,1835.96)
  Bottom Layer w10: v1(2077.48,1835.96) 2089.98,1823.46 J2.20@2130,1823.46
ETH_MDC: J1.9 U1.33 | length 416.4
  Top Layer w10: v1(857,1612) 861.15,1607.85 U1.33@905.3,1607.85
  Bottom Layer w10: v1(857,1612) 984.93,1612 1055,1541.93 1055,1498.5 1067.5,1486 1110.08,1486 J1.9@1144.96,1478.58
ETH_MDIO: J1.4 U1.42 | length 452.3
  Top Layer w10: U1.42@905.3,1430.69 955,1430.69 972.5,1413.19 972.5,1349 939,1315.5 v1(910,1315.5)
  Bottom Layer w10: v1(910,1315.5) 915.6,1321.1 J1.4@1144.96,1321.1
FMC_A0: U1.16 U3.23 | length 8045.8
  Top Layer w10: U1.16@905.3,1942.5 965.5,1942.5 v1(978,1930) ; U3.23@2712.05,1275 2712.05,1337 v1(2748,1372.95)
  Layer 1 w10: v1(675,2346) 712.73,2346 909,2149.73 909,1979 958,1930 v1(978,1930)
  Layer 2 w10: v1(675,2346) 575,2446 152,2446 19,2579 19,3420 35,3436 2682,3436 3521,2597 3521,1733 v1(3248,1460)
  Bottom Layer w10: v1(2748,1372.95) 2855.05,1480 3010,1480 3043,1513 3195,1513 v1(3248,1460)
FMC_A1: U1.17 U3.24 | length 8181.7
  Top Layer w10: v1(854,1938) 869.18,1922.82 U1.17@905.3,1922.82 ; U3.24@2680.55,1275 2680.55,1579.55 2841,1740 2841,1814 v1(2997,1970)
  Bottom Layer w10: v1(854,1938) 660,1938 558,1836 296,1836 248,1884 248,2061 44,2265 44,3420 63,3439 2893,3439 3486,2846 3486,2386 3467.5,2367.5 3467.5,2334.5 3502,2300 3502,2122 3350,1970 v1(2997,1970)
FMC_A2: U1.18 U3.25 | length 5034.5
  Top Layer w10: U1.18@905.3,1903.13 v1(955,1903.13) ; U3.25@2649.05,1275 2649.05,1583.05 2825,1759 2825,2121 v1(2897,2193)
  Layer 1 w10: v1(955,1903.13) 812,2046.13 812,2166 605,2373 605,2398 v1(1197,2990)
  Bottom Layer w10: v1(1197,2990) 2880,2990 2897,2973 v1(2897,2193)
FMC_A3: U1.19 U3.26 | length 7867.7
  Top Layer w10: v1(783.25,2380.75) 687.5,2285 616,2285 590.28,2259.28 590.28,1924.72 638,1877 668.5,1877 707,1838.5 802.5,1838.5 847.45,1883.45 U1.19@905.3,1883.45 ; v1(2617.56,1205.56) U3.26@2617.56,1275
  Layer 2 w10: v1(783.25,2380.75) 443,2721 292,2721 47,2966 47,3384 79,3416 2466,3416 3337,2545 3337,1804 3160,1627 v1(3160,1487)
  Bottom Layer w10: v1(2617.56,1205.56) 2873,1461 3134,1461 v1(3160,1487)
FMC_A4: U1.20 U3.29 | length 8618.4
  Top Layer w10: U1.20@905.3,1863.76 978.24,1863.76 v1(990,1852) ; v1(2617.56,746) U3.29@2617.56,802.56
  Layer 2 w10: v1(384,1417) 342,1459 342,2088 292,2138 217,2138 199,2120 199,327 142,270 60.5,270 48,257.5 48,67.5 67.5,48 303,48 313,58 2881,58 3397,574 3397,770 3384,783 3352,783 3259,690 2812,690 2772,730 2633.56,730 v1(2617.56,746)
  Bottom Layer w10: v1(384,1417) 457,1490 707,1490 819,1602 819,1619.35 921.08,1721.44 921.08,1755.66 990,1824.57 v1(990,1852)
FMC_A5: U1.21 U3.30 | length 4921.1
  Top Layer w10: v1(633,1850) 660.5,1822.5 823.42,1822.5 845,1844.08 U1.21@905.3,1844.08 ; v1(2649,871.95) 2649.05,871.89 U3.30@2649.05,802.56
  Layer 1 w10: v1(460,354) 697,117 1159,117 1285,243 1336,243 1389,190 1389,177 1409,157 2366,157 2721,512 2721,799.95 v1(2649,871.95)
  Layer 2 w10: v1(460,354) 460,799 633,972 v1(633,1850)
FMC_A6: U1.60 U3.31 | length 2219.3
  Top Layer w10: v1(1275,1243) 1281.89,1249.89 U1.60@1281.89,1310 ; v1(2680.55,696) U3.31@2680.55,802.56
  Layer 1 w10: v1(1275,1243) 1342.5,1175.5 1342.5,1141 1376.82,1106.68 1464.82,1106.68 1520,1051.5 1997,1051.5 2040.5,1008 2383,1008 2545,1170 2592.5,1170 2605,1157.5 2605,1080 2568.49,1043.49 2568.49,833.06 2680.55,721 v1(2680.55,696)
FMC_A7: U1.63 U3.32 | length 2352
  Top Layer w10: U1.63@1340.95,1310 1340.95,1249 1378.17,1211.78 1378.17,1175.71 1389.5,1164.38 1389.5,1004 v1(1377,991.5) ; U3.32@2712.05,802.56 2712.05,739.95 2730,722 v1(2833.53,722)
  Bottom Layer w10: v1(1377,991.5) 1377,707.5 1394.93,689.57 2216.57,689.57 2297,770 2812,770 2833.53,748.47 v1(2833.53,722)
FMC_A8: U1.64 U3.33 | length 2858.8
  Top Layer w10: U1.64@1360.63,1310 1360.63,1334.5 1360.5,1334.5 1360.5,1419.87 1392.22,1451.59 1434.59,1451.59 1490.5,1507.5 1773.5,1507.5 1830,1451 v1(1830,1398.37) ; U3.33@2743.54,802.56 2743.54,960.54 v1(2996,1213)
  Bottom Layer w10: v1(1830,1398.37) 1859.13,1369.25 1859.13,1295.96 1997.09,1158 2274,1158 2329.5,1102.5 3087.5,1102.5 3114,1129 3114,1195 3096,1213 v1(2996,1213)
FMC_A9: U1.65 U3.34 | length 1848
  Top Layer w10: U1.65@1380.32,1310 1380.32,1354.32 v1(1384,1358) ; U3.34@2775.04,802.56 v1(2775.04,860)
  Bottom Layer w10: v1(1384,1358) 1395,1347 1395,1240.74 1444.74,1191 1444.74,1123.76 1468.5,1100 1468.5,1044.5 1600,913 1788,913 1840.5,860.5 2522.93,860.5 2535,848.43 2763.47,848.43 v1(2775.04,860)
FMC_A10: U1.66 U3.22 | length 2960.6
  Top Layer w10: U1.66@1400,1310 1400,1200 v1(1412.5,1187.5) ; U3.22@2743.54,1275 2743.54,1221.66 v1(2745.37,1219.83)
  Bottom Layer w10: v1(1412.5,1187.5) 1412.5,1124 1452.5,1084 1452.5,1037.31 1669.81,820 1764.5,820 1789,844.5 2510,844.5 2534.55,819.95 3119.45,819.95 3144.5,845 3144.5,1224.49 3123.99,1245 2770.54,1245 v1(2745.37,1219.83)
FMC_A11: U1.67 U3.35 | length 2770.6
  Top Layer w10: v1(1274,741) 1302,713 1575,713 1622,760 1622,1101.28 1601.28,1122 1526.5,1122 1419.69,1228.81 U1.67@1419.69,1310 ; v1(2794.03,746) 2806.53,758.5 U3.35@2806.53,802.56
  Bottom Layer w10: v1(1274,741) 1429,586 2145.64,586 2283.64,724 2354.5,724 2356.5,722 2770.03,722 v1(2794.03,746)
FMC_A12: U1.106 U3.36 | length 2691.4
  Top Layer w10: v1(1833,1750) 1857.03,1725.97 U1.106@1914.39,1725.97 ; U3.36@2838.03,802.56 v1(2838.03,858)
  Layer 2 w10: v1(1833,1750) 1875,1708 1875,1678.5 1892,1661.5 1892,1537 1988,1441 1988,1338.5 1956.5,1307 1907,1307 1849,1249 1783,1249 1782,1248 1782,1207.5 1795.5,1194 v1(1881,1194)
  Bottom Layer w10: v1(1881,1194) 2019,1056 2972,1056 3114,914 3114,859 3113,858 v1(2838.03,858)
FMC_A16_CLE: J2.23 U1.99 U4.16 | length 1683.1
  Top Layer w10: U1.99@1914.39,1588.17 v1(1964.17,1588.17) ; U4.16@2617.6,2215 v1(2713.5,2215)
  Layer 1 w10: v1(2192.5,1905) 2205.45,1917.95 2276.05,1917.95 2300,1894 2487,1894 2713.5,2120.5 v1(2713.5,2215)
  Layer 2 w10: v1(1964.17,1588.17) 1988,1612 1988,1699 1952,1735 1952,1771.5 1978.5,1798 2045.98,1798 2055.5,1788.48 2055.5,1750 2056.5,1749 2098,1749 2141,1706 2202.5,1706 2216.5,1720 2216.5,1881 v1(2192.5,1905)
  Bottom Layer w10: J2.23@2130,1917.95 2179.55,1917.95 v1(2192.5,1905)
FMC_A17_ALE: J2.21 U1.100 U4.17 | length 1290.1
  Top Layer w10: v1(1851.94,1620.5) 1864.58,1607.85 U1.100@1914.39,1607.85 ; v1(2536,2195) 2536.31,2195.31 U4.17@2617.6,2195.31
  Layer 2 w10: v1(2181,1854.96) 2169,1866.96 2169,1927.5 2170,1928.5 2243.5,1928.5 2247,1925 2321,1925 2341,1945 2341,2156 2380,2195 v1(2536,2195)
  Bottom Layer w10: v1(1851.94,1620.5) 1907,1675.56 1907,1724.99 2041.48,1859.46 2096.47,1859.46 2100.98,1854.96 J2.21@2130,1854.96 v1(2181,1854.96)
FMC_A18: J2.14 U1.101 | length 231.3
  Top Layer w10: U1.101@1914.39,1627.54 1996.55,1627.54 v1(2016,1646.99)
  Bottom Layer w10: v1(2016,1646.99) 2033.49,1629.5 2099.55,1629.5 J2.14@2130,1634.49
FMC_BA0: U1.108 U3.20 | length 1392.1
  Top Layer w10: v1(1864,1765) 1864.34,1765.34 U1.108@1914.39,1765.34 ; U3.20@2806.53,1275 v1(2806.53,1349)
  Layer 1 w10: v1(2247,1505) 2311,1505 2402,1414 2404.5,1352 2455,1352 2484,1381 2634,1381 2666,1349 v1(2806.53,1349)
  Layer 2 w10: v1(1864,1765) 1896,1733 1896,1700 1912,1684 1912,1582 1930,1564 1993,1564 2012,1583 2077,1583 2116,1544 2208,1544 v1(2247,1505)
FMC_BA1: U1.109 U3.21 | length 1325
  Top Layer w10: U1.109@1914.39,1785.02 2009.98,1785.02 v1(2024,1771) ; U3.21@2775.04,1275 v1(2775.04,1564)
  Layer 1 w10: v1(2024,1771) 2049,1796 2118,1796 2149.02,1764.98 2230.98,1764.98 2245.97,1779.97 2313.03,1779.97 2342.5,1750.5 2342.5,1663.99 2355,1651.49 2687.55,1651.49 v1(2775.04,1564)
FMC_D0: J2.45 U1.104 U3.2 U4.29 | length 4222.6
  Top Layer w10: v1(1851.5,1687) 1851.91,1686.59 U1.104@1914.39,1686.59 ; v1(3373,1218) 3387.96,1218 ; U3.2@3373.46,1275 3373.46,1232.5 3387.96,1218 ; 3456,2135.26 3456,1231.5 ; 3387.96,1218 3442.5,1218 3456,1231.5 ; 3456,1231.5 3457,1232.5 3457,2135.26 3455.98,2135.28 ; 3455.98,2135.28 3455,2136.26 U4.29@3405,2136.26 3455.98,2135.28
  Layer 1 w10: v1(1851.5,1687) 1911.09,1627.41 1963.59,1627.41 1985.94,1605.06 2122.56,1605.06 2150.5,1633 2242.5,1633 ; v1(2264.08,1684.98) 2264.08,1654.57 2242.5,1633 ; v1(3373,1218) 3349.5,1194.5 3300,1194.5 3287,1207.5 3287,1225 3365.47,1303.47 3365.47,1403 3339.6,1428.87 3049.03,1439.97 2485.03,1439.97 2292,1633 2242.5,1633
  Bottom Layer w10: v1(2264.08,1684.98) 2276.58,1697.48 J2.45@2315.04,1697.48
FMC_D1: J2.46 U1.105 U3.4 U4.30 | length 2995.4
  Top Layer w10: U1.105@1914.39,1706.28 1999.5,1706.28 v1(2012,1718.78) ; v1(3322.5,1218) 3310.47,1230.03 U3.4@3310.47,1275 3310.47,2144.42 3322,2155.94 U4.30@3405,2155.94
  Layer 1 w10: v1(2012,1718.78) 2042.2,1748.98 2121.52,1748.98 v1(2192,1678.5) ; v1(2378.52,1678.5) 3291.5,1678.5 3381.47,1588.53 3381.47,1276.97 v1(3322.5,1218)
  Bottom Layer w10: v1(2192,1678.5) 2192,1671 2201.52,1661.48 2283.07,1661.48 2287.58,1665.98 J2.46@2315.04,1665.98 2366,1665.98 v1(2378.52,1678.5)
FMC_D2: J2.47 U1.142 U3.5 U4.31 | length 5959.5
  Top Layer w10: U1.142@1655.91,2319.09 v1(1655.91,2439) ; v1(3250,1634.49) 3278.98,1605.51 U3.5@3278.98,1275 ; U4.31@3405,2175.63 v1(3462,2175.63)
  Layer 2 w10: v1(3250,1634.49) 3462,1846.49 v1(3462,2175.63)
  Bottom Layer w10: v1(1655.91,2439) 1681,2464.09 1681,2508 1667.17,2521.83 1560.17,2521.83 1257,2825 1257,2957.5 1269.5,2970 2754,2970 2834,2890 2834,2211 3042,2003 3289.37,2003 v1(3462,2175.63) ; J2.47@2315.04,1634.49 v1(3250,1634.49)
FMC_D3: J2.48 U1.143 U3.7 U4.32 | length 4280.6
  Top Layer w10: U1.143@1636.22,2319.09 1636.22,2249.78 v1(1652,2234) ; v1(2379,1602.99) 2416,1639.99 2416,2017 2446,2047 v1(2446,2224) ; v1(3203.5,1602.99) 3203.5,2170 3216,2182.5 ; U3.7@3215.98,1275 3215.98,1615.48 3216,2182.5 ; U4.32@3405,2195.31 3228.81,2195.31 3216,2182.5
  Layer 1 w10: v1(1652,2234) 1682.55,2234 1746.55,2298 2033,2298 2153,2418 2277,2418 2446,2249 v1(2446,2224)
  Bottom Layer w10: J2.48@2315.04,1602.99 v1(2379,1602.99) v1(3203.5,1602.99)
FMC_D4: J2.49 U1.68 U3.8 U4.41 | length 3885.5
  Top Layer w10: U1.68@1439.37,1310 1439.37,1249.44 v1(1454,1234.81) ; v1(2357,1032) 2418,1093 2418,1259.54 2413,1264.54 v1(2413,1571.5) ; U3.8@3184.49,1275 v1(3184.49,1461) ; U4.41@3405,2372.48 3484.02,2372.48 v1(3497,2359.5)
  Layer 1 w10: v1(1454,1234.81) 1454,1194 1580.5,1067.5 2321.5,1067.5 v1(2357,1032) ; v1(2428,1571.5) 2538.5,1461 v1(3184.49,1461)
  Layer 2 w10: v1(3184.49,1461) 3497,1773.51 v1(3497,2359.5)
  Bottom Layer w10: J2.49@2315.04,1571.5 v1(2413,1571.5) v1(2428,1571.5)
FMC_D5: J2.50 U1.69 U3.10 U4.42 | length 4226.5
  Top Layer w10: v1(1459,1395) 1459.06,1394.94 U1.69@1459.06,1310 ; v1(3121,1540) v1@3121.5,1539.5 ; U3.10@3121.5,1275 v1@3121.5,1539.5 ; v1(3121.5,1567) v1(3121.5,1540) v1@3121.5,1539.5 ; v1(3313.16,2392.16) U4.42@3405,2392.16
  Layer 1 w10: v1(1459,1395) 1459,1499 1516,1556 1673,1556 1828,1711 1874.41,1711 1942,1643.41 1970.59,1643.41 1990.51,1623.49 2105.49,1623.49 2136.49,1654.49 2217.5,1654.49 2233,1669.99 2233,1707.5 2237.47,1711.97 2292.5,1711.97 2306,1698.47 2306,1654 2329,1631 2565,1631 2656,1540 v1(3121,1540)
  Layer 2 w10: v1(3121.5,1567) 3121.5,2200.5 v1(3313.16,2392.16)
  Bottom Layer w10: J2.50@2315.04,1540 v1(3121,1540) v1(3121.5,1540)
FMC_D6: J2.51 U1.70 U3.11 U4.43 | length 4693.6
  Top Layer w10: U1.70@1478.74,1310 1478.74,1208.26 1517,1170 1604,1170 v1(1620.5,1186.5) ; v1(2252.5,1546) 2270.5,1528 2270.5,1490.5 2336,1425 v1(2336,1137.06) ; v1(3090,1078) v1(3090,1152) U3.11@3090,1275 v1(3090,2040) ; U4.43@3405,2411.85 3461.85,2411.85 v1(3462,2412)
  Bottom Layer w10: v1(1620.5,1186.5) 1670.5,1236.5 1768,1236.5 1792.5,1261 1869.54,1261 2052.54,1078 v1(3090,1078) ; v1(2252.5,1546) 2273,1525.5 2273,1509.5 J2.51@2315.04,1508.5 ; v1(2336,1137.06) 2354.56,1118.5 3056.5,1118.5 v1(3090,1152) ; v1(3090,2040) v1(3462,2412)
FMC_D7: J2.52 U1.73 U3.13 U4.44 | length 3225.4
  Top Layer w10: U1.73@1537.8,1310 v1(1537.8,1419.5) ; U3.13@3027.01,1275 v1(3027.01,1414) v1(3027.01,2169.54) ; v1(3289,2431.53) U4.44@3405,2431.53
  Layer 1 w10: v1(1537.8,1419.5) 1638.3,1520 1797.84,1520 1841.84,1564 2015.5,1564 2044,1535.5 2086,1535.5 2167.5,1617 2238.51,1617 v1(2366,1489.51) 2441.51,1414 v1(3027.01,1414)
  Bottom Layer w10: J2.52@2315.04,1477.01 2353.5,1477.01 v1(2366,1489.51) ; v1(3027.01,2169.54) v1(3289,2431.53)
FMC_D8: J2.53 U1.74 U3.42 | length 3067.8
  Top Layer w10: v1(1520,1203) 1557.48,1240.48 U1.74@1557.48,1310 ; U3.42@3027.01,802.56 v1(3027.01,943)
  Layer 2 w10: v1(2264,1450) 2795,1450 2838.03,1406.97 2838.03,1342.47 2966,1214.5 v1(2966,1016.5)
  Bottom Layer w10: v1(1520,1203) 1520,1119.5 1542.5,1097 1707,1097 1825,979 2928.5,979 ; v1(2264,1450) 2268.49,1445.51 J2.53@2315.04,1445.51 ; v1(2966,1016.5) 2928.5,979 ; v1(3027.01,943) 2991.01,979 2928.5,979
FMC_D9: J2.54 U1.75 U3.44 | length 3325
  Top Layer w10: v1(1577,1360) 1577.17,1359.83 U1.75@1577.17,1310 ; U3.44@3090,802.56 v1(3090,883)
  Layer 2 w10: v1(2372.05,1401.52) 2388.05,1417.52 2578.78,1417.52 2709.37,1286.93 2709.37,1145.77 2972.14,883 v1(3090,883)
  Bottom Layer w10: v1(1577,1360) 1542.5,1360 1528,1345.5 1527,1274 1494,1274 1477.5,1257.5 1477.5,1124.37 1503.24,1098.63 1503.24,1036.03 1610.27,929 1824,929 1857.5,895.5 2660.5,895.5 2707,942 2964,942 3023,883 v1(3090,883) ; J2.54@2315.04,1414.02 2359.55,1414.02 v1(2372.05,1401.52)
FMC_D10: J2.55 U1.76 U3.45 | length 2331.6
  Top Layer w10: v1(1584.5,1250) 1596.85,1262.35 U1.76@1596.85,1310 ; v1(3121,746) 3121.5,746.5 U3.45@3121.5,802.56
  Layer 1 w10: v1(1584.5,1250) 1621.5,1287 1693,1287 1778.38,1201.62 1818.62,1201.62 1834.5,1217.5 2127.53,1217.5 2171.07,1261.04 2225.04,1261.04 2264,1300 v1(2264,1370.02)
  Layer 2 w10: v1(2436.5,1378.02) 2436.5,963.25 2629.75,770 3097,770 v1(3121,746)
  Bottom Layer w10: v1(2264,1370.02) 2276.5,1382.52 J2.55@2315.04,1382.52 2348.55,1382.52 2353.05,1378.02 v1(2436.5,1378.02)
FMC_D11: J2.56 U1.77 U3.47 | length 2601.7
  Top Layer w10: v1(1592,1420) 1616.54,1395.46 U1.77@1616.54,1310 ; v1(3171.5,746) 3184.49,758.99 U3.47@3184.49,802.56
  Layer 2 w10: v1(2492,1351.02) 2492,1179.13 2737,934.13 2737,820 2754,803 3114.5,803 v1(3171.5,746)
  Bottom Layer w10: v1(1592,1420) 1599,1413 1770,1413 1791.5,1434.5 1842.7,1434.5 1906.5,1370.7 1906.5,1289.73 2007.19,1189.04 2401,1189.04 2402,1190.04 2402,1320.5 2371.48,1351.02 ; J2.56@2315.04,1351.02 2371.48,1351.02 ; v1(2492,1351.02) 2371.48,1351.02
FMC_D12: J2.57 U1.78 U3.48 | length 2310
  Top Layer w10: v1(1636.22,1141.64) 1644,1149.42 1644,1252.22 1636.22,1260 U1.78@1636.22,1310 ; U3.48@3215.98,802.56 v1(3215.98,861.5)
  Layer 1 w10: v1(2240,1320) 2240,1391.52 2242,1393.52 2318.48,1393.52 2342,1370 2342,1277.22 2354.59,1264.63 2812.85,1264.63 v1(3215.98,861.5)
  Layer 2 w10: v1(1636.22,1141.64) 2008.61,1141.64 v1(2186.5,1319.53)
  Bottom Layer w10: v1(2186.5,1319.53) v1@2240.47,1319.53 ; v1(2240,1320) v1@2240.47,1319.53 ; J2.57@2315.04,1319.53 v1@2240.47,1319.53
FMC_D13: J2.58 U1.96 U3.50 | length 2513.9
  Top Layer w10: v1(1851.5,1532.5) 1854.89,1529.11 U1.96@1914.39,1529.11 ; U3.50@3278.98,802.56 3278.98,884 v1(3291.48,896.5)
  Layer 1 w10: v1(1851.5,1532.5) 1933.5,1532.5 1977.18,1488.82 2071.32,1488.82 2183.5,1601 2228.5,1601 2229.5,1600 2229.5,1570 2229,1569.5 2229,1528.5 2223.25,1522.75 2223.25,1385.27 2216,1378.02 2216,1313.03 v1(2191,1288.03) ; v1(2366,1300.53) 3242.47,1300.53 3270.5,1272.5 3270.5,1189.5 3366,1094 3366,908 3354.5,896.5 v1(3291.48,896.5)
  Bottom Layer w10: v1(2191,1288.03) J2.58@2315.04,1288.03 2353.5,1288.03 v1(2366,1300.53)
FMC_D14: J2.59 U1.97 U3.51 | length 2280.4
  Top Layer w10: U1.97@1914.39,1548.8 1986.2,1548.8 v1(1999,1536) ; v1(3310.47,703) U3.51@3310.47,802.56
  Layer 1 w10: v1(2264,1256.54) 2275.4,1245.13 2645.37,1245.13 2658,1232.5 2658,994 2600.49,936.49 2600.49,898 2603.05,895.45 2673,895.45 2793.45,775 3238.47,775 v1(3310.47,703)
  Layer 2 w10: v1(1999,1536) 2042.5,1536 2043,1535.5 2065.75,1535.5 2074,1527.25 2174.49,1527.25 2223.25,1478.49 2223.25,1389.75 2239,1374 2239,1357.5 2264,1332.5 v1(2264,1256.54)
  Bottom Layer w10: v1(2264,1256.54) J2.59@2315.04,1256.54
FMC_D15: J2.60 U1.98 U3.53 | length 3427.7
  Top Layer w10: v1(1819.25,1588.25) 1839.02,1568.48 U1.98@1914.39,1568.48 ; v1(3373.46,732.46) U3.53@3373.46,802.56
  Layer 1 w10: v1(1819.25,1588.25) 1771,1540 1530,1540 1514,1524 1514,1410 1463,1359 1463,1357 1559.5,1260.5 1559.5,1171.5 1617.22,1113.78 1879.76,1113.78 1929.76,1163.78 2329.74,1163.78 v1(2378.5,1212.54)
  Layer 2 w10: v1(2378.5,1212.54) 2401.5,1189.54 2401.5,678 2423,656.5 3297.5,656.5 v1(3373.46,732.46)
  Bottom Layer w10: J2.60@2315.04,1225.04 2366,1225.04 v1(2378.5,1212.54)
FMC_NBL0: J2.43 U1.169 U3.15 | length 4087.7
  Top Layer w10: v1(1124,2271) 1124.41,2271.41 U1.169@1124.41,2319.09 ; U3.15@2964.01,1275 v1(2964.01,1504) v1(2964.01,1516.49)
  Layer 2 w10: v1(1124,2271) 1108,2287 1108,2396 1127,2415 1271.66,2415 1316.16,2459.5 1525.43,2459.5 1658.43,2592.5 2488.5,2592.5 2613.85,2467.15 2613.85,2012.28 2342,1740.43 2342,1669.97 ; v1(2264,1747.97) 2342,1669.97 ; v1(2964.01,1504) 2937.01,1531 ; v1(2964.01,1516.49) 2949.5,1531 2937.01,1531 ; 2342,1669.97 2342,1544 2355,1531 2376.66,1531 ; 2342,1669.97 2355.26,1656.71 2355.26,1552.41 2376.66,1531 ; 2376.66,1531 2937.01,1531
  Bottom Layer w10: v1(2264,1747.97) 2276.5,1760.47 J2.43@2315.04,1760.47
FMC_NBL1: J2.44 U1.170 U3.39 | length 4957.1
  Top Layer w10: U1.170@1104.73,2319.09 1104.73,2403.23 v1(1140,2438.5) ; v1(2932.52,722) U3.39@2932.52,802.56
  Layer 2 w10: v1(1140,2438.5) 1202.5,2501 1317.5,2501 1329.5,2489 1463,2489 1608.49,2634.49 2699.01,2634.49 2701,2373 2685,2357 2685,2204 2706,2183 2706,2069 2528,1891 ; v1(2366,1729) 2528,1891 ; v1(2932.52,722) 3208,722 3261,775 3261,1242 3085.5,1417.5 3085.5,1691.5 2886,1891 2528,1891
  Bottom Layer w10: J2.44@2315.04,1728.98 v1(2366,1729)
FMC_NCE3: R17.2 U1.152 U4.9 | length 3579.1
  Top Layer w10: U1.152@1459.06,2319.09 v1(1459.06,2403.5) ; v1(2429,2352.79) U4.9@2617.6,2352.79
  Layer 1 w10: v1(1459.06,2403.5) 1548.06,2314.5 1992.5,2314.5 2122,2444 2337.79,2444 v1(2429,2352.79)
  Layer 2 w10: v1(484,1446) 484,2097.5 477.06,2104.44 477.06,2263.06 v1(484,2270)
  Bottom Layer w10: R17.2@450.06,1355 450.06,1412.06 v1(484,1446) ; v1(484,2270) 704,2490 1055,2490 1073,2472 1073,2361 1115,2319 1436,2319 1459.06,2342.06 v1(1459.06,2403.5)
FMC_NE1: J1.35 U1.151 | length 438.8
  Top Layer w10: v1(1478.74,2222) U1.151@1478.74,2319.09
  Layer 1 w10: v1(1279.02,2014.02) 1279.02,2022.28 v1(1478.74,2222)
  Bottom Layer w10: v1(1279.02,2014.02) J1.35@1330,2014.02
FMC_NOE: J2.26 U1.146 U4.8 | length 2152.4
  Top Layer w10: U1.146@1577.17,2319.09 1577.17,2463 v1(1667.17,2553) ; U4.8@2617.6,2372.48 2673.48,2372.48 2677,2376 v1(2677,2401)
  Layer 1 w10: v1(1667.17,2553) 2525,2553 v1(2677,2401) 2677,2376 2325.94,2024.94 v1(2191.44,2024.94)
  Bottom Layer w10: J2.26@2130,2012.44 2178.94,2012.44 v1(2191.44,2024.94)
FMC_NWAIT: J2.27 U1.150 U4.7 | length 1998.6
  Top Layer w10: U1.150@1498.43,2319.09 1498.43,2477.5 v1(1581.18,2560.25) ; v1(2525.83,2392.16) U4.7@2617.6,2392.16
  Layer 1 w10: v1(1581.18,2560.25) 1642.43,2499 2419,2499 v1(2525.83,2392.16)
  Layer 2 w10: v1(2189,2056.44) 2215.93,2056.44 2228.43,2043.94 2291.41,2043.94 2304.98,2057.5 2304.98,2171.31 v1(2525.83,2392.16)
  Bottom Layer w10: J2.27@2130,2043.94 2176.5,2043.94 v1(2189,2056.44)
FMC_NWE: J2.22 U1.147 U4.18 | length 1758.7
  Top Layer w10: U1.147@1557.48,2319.09 1557.48,2257.5 1569.98,2245 1589.5,2245 1602,2232.5 v1(1602,2102) ; U4.18@2617.6,2175.63 v1(2674,2175.63)
  Layer 1 w10: v1(1602,2102) 1635,2069 1850,2069 1866,2085 1990,2085 2011,2064 2090,2064 2181,1973 ; v1(2073.25,1892.71) 2153.54,1973 2181,1973 ; v1(2674,2175.63) 2674,2160.08 2458.86,1944.94 2343.06,1944.94 2315,1973 2181,1973
  Bottom Layer w10: v1(2073.25,1892.71) 2079.5,1886.46 J2.22@2130,1886.46
FMC_SDCKE0: U1.35 U3.37 | length 4587
  Top Layer w10: v1(607,1462) 665.76,1462 772.24,1568.48 U1.35@905.3,1568.48 ; v1(2858,745) 2869.53,756.53 U3.37@2869.53,802.56
  Layer 2 w10: v1(607,1126) v1(607,1462)
  Bottom Layer w10: v1(607,1126) 671,1062 671,970 655,954 592.5,954 578,939.5 578,841 334,597 334,543 512,365 512,220 526,206 980,206 1017,243 1092,243 1126,209 1196,209 1296,309 1680.5,309 1907.5,536 2119,536 2291,708 2341,708 2388,661 2811,661 2858,708 v1(2858,745)
FMC_SDCLK: U1.112 U3.38 | length 3090.2
  Top Layer w10: v1(1864,1844.08) U1.112@1914.39,1844.08 ; U3.38@2901.02,802.56 v1(2901.02,896.5)
  Layer 1 w10: v1(1864,1844.08) 1867.92,1848 2001.61,1848 2037.61,1812 2154,1812 2157.5,1815.5 2204.5,1815.5 2222.54,1797.46 2359.54,1797.46 2389,1768 2716.5,1768 2719.5,1771 3328,1771 3397.47,1701.53 3397.47,905.47 3330,838 2959.52,838 v1(2901.02,896.5)
FMC_SDNCAS: U1.160 U3.17 | length 5105
  Top Layer w10: U1.160@1301.58,2319.09 1301.58,2373.58 v1(1314,2386) ; U3.17@2901.02,1275 2901.02,1821.02 v1(2995,1915)
  Layer 1 w10: v1(2943,3010) 2943,1967 v1(2995,1915)
  Bottom Layer w10: v1(1314,2386) 1314,2403.5 1243.5,2474 1142.5,2474 1122,2494.5 1122,2741 1057,2806 1057,3395 1078,3416 2537,3416 v1(2943,3010)
FMC_SDNE0: R19.2 U1.34 U3.19 | length 4501.8
  Top Layer w10: U1.34@905.3,1588.17 v1(955,1588.17) ; v1(1057.5,915.5) 1125.06,847.94 R19.2@1125.06,800 ; U3.19@2838.03,1275 2838.03,1356 v1(2870,1387.97)
  Layer 2 w10: v1(955,1588.17) 886.5,1519.67 886.5,1218.5 1057.5,1047.5 v1(1057.5,915.5)
  Bottom Layer w10: v1(1057.5,915.5) 1161,1019 1384,1019 1433,970 1433,770 1450,753 1688,753 1708,733 1708,706.57 1709,705.57 1897.57,705.57 1984,792 3135.48,792 3160.5,817.02 3160.5,989.5 3184,1013 3184,1416.24 3158.24,1442 2924.03,1442 v1(2870,1387.97)
FMC_SDNRAS: U1.59 U3.18 | length 2870
  Top Layer w10: v1(1246.38,1409) 1242.5,1405.12 1242.5,1373.71 1262.21,1354 U1.59@1262.21,1310 ; v1(2542,1018) 2769,1018 2869.53,1118.53 U3.18@2869.53,1275
  Layer 1 w10: v1(1269,654) 1307,692 2216,692 v1(2542,1018)
  Layer 2 w10: v1(1246.38,1409) 1285,1409 1299,1395 1299,684 v1(1269,654)
FMC_SDNWE: U1.32 U3.16 | length 8980.4
  Top Layer w10: U1.32@905.3,1627.54 966.54,1627.54 v1(978,1639) ; U3.16@2932.52,1275 2932.52,1214 v1(2936,1210.52)
  Layer 1 w10: v1(330,1208) 330,1891.5 369.75,1931.25 497.75,1931.25 640,1789 640,1537 655.5,1521.5 707,1521.5 714.5,1529 892,1529 927,1564 978,1564 979,1565 979,1638 v1(978,1639)
  Layer 2 w10: v1(330,1208) 330,1051 226,947 226,246 357,115 2909.5,115 2927,132.5 2927,595 2905,617 2432,617 2310,739 2310,1202 2413,1305 2413,1400.52 2414,1401.52 2494.98,1401.52 2536,1360.5 2536,1228 2911,853 3097,853 3114,870 3114,897.5 3018.5,993 2950.5,993 2936,1007.5 v1(2936,1210.52)
GBC_KEY: J1.15 U1.13 | length 908.8
  Top Layer w10: v1(768.5,1862) 794.03,1862 809,1876.97 809,1980.56 830,2001.56 U1.13@905.3,2001.56
  Layer 1 w10: v1(768.5,1862) 824.09,1806.41 991.08,1806.41 1038.05,1853.38 1105,1853.38 1117.5,1840.88 1117.5,1746.06 v1(1196,1667.56)
  Bottom Layer w10: J1.15@1144.96,1667.56 v1(1196,1667.56)
GBC_LED: J1.45 U1.50 | length 610.6
  Top Layer w10: U1.50@1085.04,1310 1085.04,1339 1088.5,1342.46 1088.5,1361.46 1096.52,1369.48 1105,1369.48 1118,1382.48 1118,1683.65 1128.9,1694.55 v1(1254,1694.55)
  Bottom Layer w10: v1(1254,1694.55) 1258.5,1699.06 J1.45@1330,1699.06